# Altium PCB Power.PcbDoc
Units mm, origin at the board's own origin, x right, y up, seen from the top; angles counter-clockwise.
Board outline 22 x 16 mm, 2 copper layers (Top Layer, Bottom Layer); 8 components, 10 nets, 38 pads, 0 vias.
Unrouted connection lines stored in the file: 19.
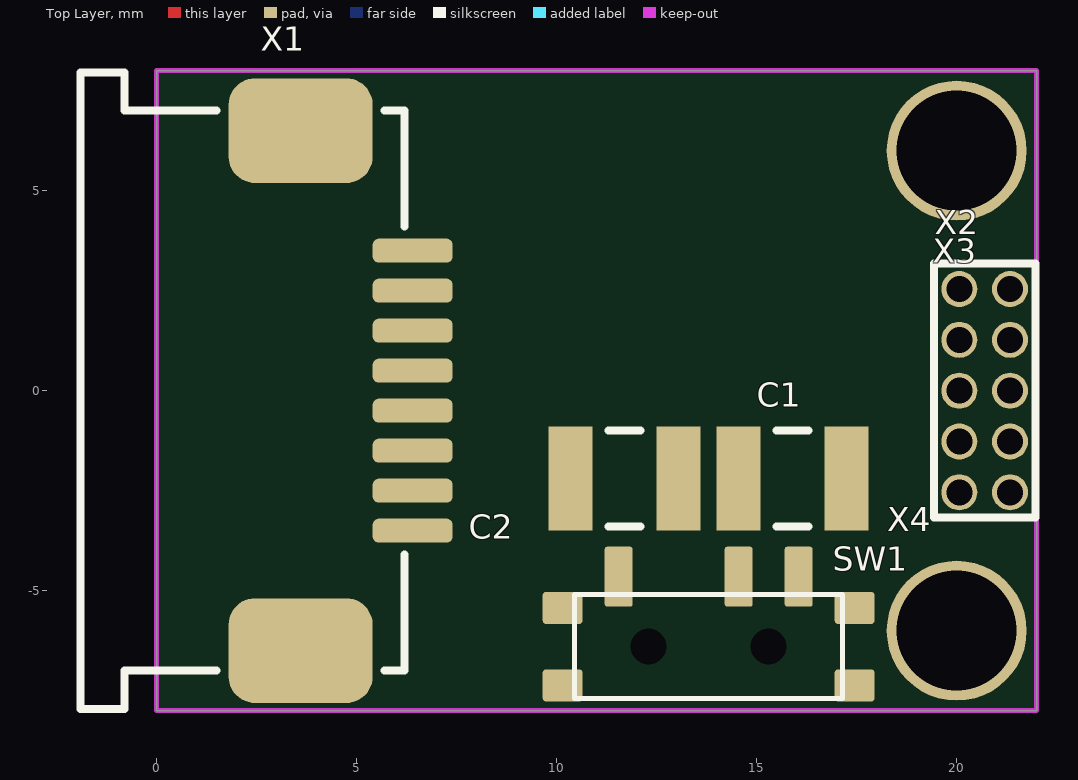
[diagram p0: Top Layer view]
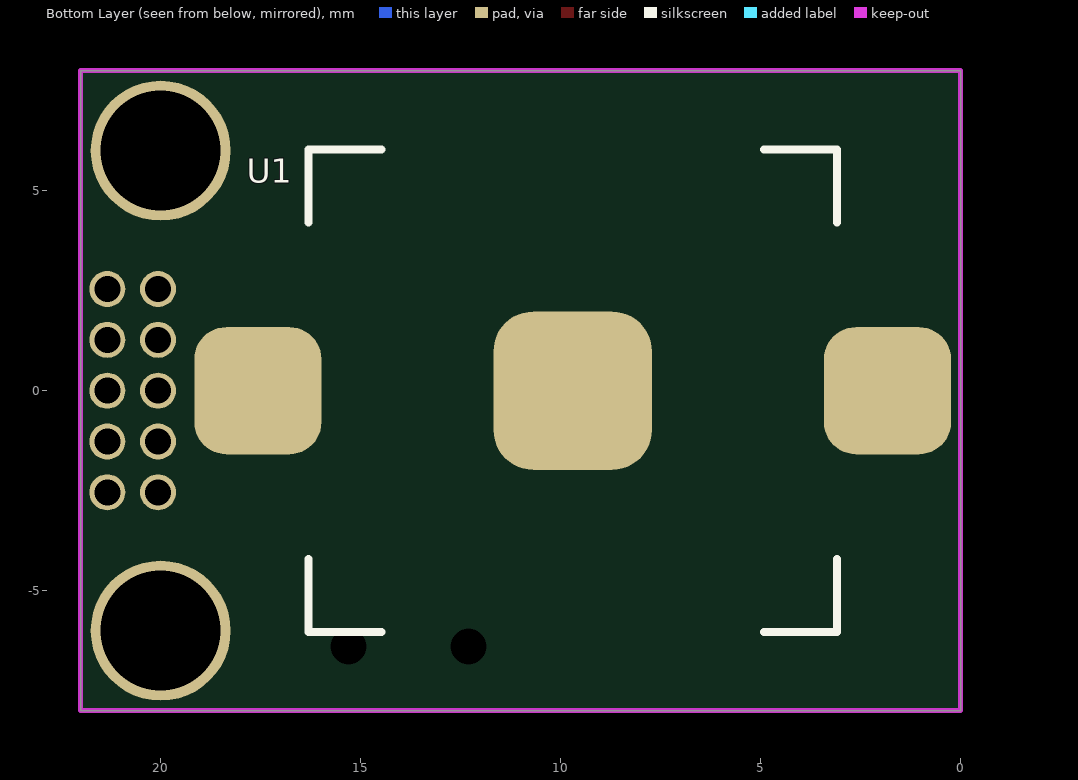
[diagram p1: Bottom Layer view, seen from below]

## Layer stack, top to bottom
Top Solder: solder mask 0.0102, Solder Resist, Dk 3.5
Top Layer: signal copper 0.0356
Dielectric 1: dielectric 0.32, FR-4, Dk 4.8
Bottom Layer: signal copper 0.0356
Bottom Solder: solder mask 0.0102, Solder Resist, Dk 3.5

## Board outline
0,-8 22,-8 22,8 0,8

## Design rules (kind name [scope] priority, off if disabled: settings)
Clearance ClearancePoly [InPoly] p1: gap=0.25 ignorepadtopadclearanceinfootprint=FALSE
Clearance [All] p2: gap=0.125 ignorepadtopadclearanceinfootprint=FALSE
HoleSize [All] p1: absolutevalues=TRUE maxlimit=0.9 minlimit=0.2 maxpercent=80.000 minpercent=20.000
PolygonConnect PolygonConnectE1 [HasFootprint('2450AT18D0100')] p1: connectstyle=Direct reliefconductorwidth=0.254 reliefentries=4 polygonreliefangle="90 Angle" airgapwidth=0.254
PolygonConnect [All] p2: thpad.connectstyle=Relief thpad.reliefconductorwidth=0.25 thpad.reliefentries=4 thpad.polygonreliefangle="90 Angle" thpad.airgapwidth=0.25 smdpad.connectstyle=Relief smdpad.reliefconductorwidth=0.25 smdpad.reliefentries=4 smdpad.polygonreliefangle="90 Angle" smdpad.airgapwidth=0.25 via.connectstyle=Direct via.reliefconductorwidth=0.25 via.reliefentries=4 via.polygonreliefangle="90 Angle" via.airgapwidth=0.25
RoutingVias [All] p1: holewidth=0.2 width=0.45 viastyle="Through Hole" minholewidth=0.2 minwidth=0.45 maxholewidth=0.9 maxwidth=1.5
SolderMaskExpansion [All] p1: expansion=0.102
Width [All] p1: maxlimit=0.5 minlimit=0.125 preferedwidth=0.25
29 further rules are at their usual default settings.

## Components (designator, comment, footprint, x,y, rotation, side; value= is the part's Value field where it differs from the comment)
C1 "330u 4V" CAPC3225L 15.9,-2.2 r0 top
C2 "330u 4V" CAPC3225L 11.7,-2.2 r180 top
SW1 "PCM12SMTR" PCM12SMTR 13.8,-6.4 r0 top
U1 "Keystone 3000" BK-3000 9.7,0 r0 bottom
X1 "TE connectivity 84952-8" "ZIF connector 84952-8" 2.7,0 r270 top locked
X2 "Amphenol FCI 20021111-00010T4LF" HDR-1.27mm-2X5 20.7,0 r270 top
X3 "PAD" PAD3mm 20,6 r0 top value=-
X4 "PAD" PAD3mm 20,-6 r0 top value=-

## Footprints (in the part's own frame and the unit in brackets; to place one, negate y for a bottom-side part, rotate by r counter-clockwise, add the part's x,y. Pads: shape width x height; smd on the part's side, far side on the other; paste and mask are expansions set on the pad)
BK-3000 [mm] "Battery contact"
  rrect50% 3.18x3.18 smd: 1(-7.87,0) 1(7.87,0)
  rrect50% 3.96x3.96 smd: 2(0,0)
  silkscreen extent -6.61,-6.04 6.61,6.03, body extent -6.61,-6.04 6.61,6.03, height 3.18
CAPC3225L [mm] "Chip Capacitor, Body 3.2x2.5mm, IPC High Density"
  rect 1.1x2.6 smd: 1(-1.35,0) 2(1.35,0)
  silkscreen extent -0.4,-1.2 0.4,1.2, body extent -1.7,-1.35 1.7,1.35, height 1.35
HDR-1.27mm-2X5 [mm] "Header 1.27mm"
  round 0.9 hole 0.65: 1(-2.54,-0.635) 2(-2.54,0.635) 3(-1.27,-0.635) 4(-1.27,0.635) 5(0,-0.635) 6(0,0.635) 7(1.27,-0.635) 8(1.27,0.635) 9(2.54,-0.635) 10(2.54,0.635)
  silkscreen extent -3.18,-1.27 3.18,1.27, body extent -3.18,-1.27 3.18,1.27, height 1.5
PAD3mm [mm] "PAD"
  round 3.5 hole 3: 1(0,0)
PCM12SMTR [mm]
  round 0 hole 0.9: 0(-1.5,0) 0(1.5,0)
  rrect20% 0.7x1.5 smd: 1(-2.25,1.75) 2(0.75,1.75) 3(2.25,1.75)
  rrect20% 1x0.8 smd: 4(-3.65,-0.97) 4(-3.65,0.97) 4(3.65,-0.97) 4(3.65,0.97)
  silkscreen extent -3.35,-1.3 3.35,1.3, body extent -3.35,-1.3 3.35,1.3, height 1.4
"ZIF connector 84952-8" [mm] "FPC connector 1mm"
  rrect50% 2.62x3.6 smd: 0(-6.5,0.9) 0(6.5,0.9)
  rrect50% 0.6x2 smd: 1(-3.5,3.7) 2(-2.5,3.7) 3(-1.5,3.7) 4(-0.5,3.7) 5(0.5,3.7) 6(1.5,3.7) 7(2.5,3.7) 8(3.5,3.7)
  silkscreen extent -7.96,-4.6 7.96,3.5, body extent -7,-2.68 7,2.7, height 1.5

## Part data
C1 C2: library part Capacitor, "Capacitor", Package=1210, PartNumber="490-13976-1-ND #Digikey"
SW1: library part SPDT, "Miniature Surface Mount Switches", PartNumber="401-2016-1-ND #Digikey"
U1: library part Battery, "Battery", Package="CR1220 battery", PartNumber="36-3000CT-ND #Digikey"
X1: library part DB-8F, "Header", Package=ZIF-8, PartNumber="A100249CT-ND #Digikey"
X2: library part DB-10F, "Header", PartNumber="609-3712-ND #Digikey"
X3 X4: PartNumber=-

## Nets (pads, with @x,y where several pads share a name; then routed paths per layer and width w, separated by ;. In a path a pad name is that pad's centre, name@x,y a point inside that pad or via, vN(x,y) a via of type N, cw(c..) or ccw(c..) an arc to the next point about the centre after c; other vN are vias at no path point)
GND: C1.2 C2.2 U1.2 X1.8 X2.8 X2.10 X3.1 X4.1
In1: X1.1 X2.1
In2: X1.2 X2.2
In3: X1.3 X2.3
In4: X1.4 X2.4
In5: X1.5 X2.5
In6: X1.6 X2.6
In7: X1.7 X2.7
NetSW1_2: SW1.2 U1.1
VBAT: C1.1 C2.1 SW1.3 X2.9
pads on no net: SW1.0 SW1.1 SW1.4 X1.0

## Keep-outs
Keep-Out Layer:
  the board outline again, w0.125

## Dimensions
0,-8 to 22,-8 on Mechanical 1
0,-8 to 0,8 on Mechanical 1